# Altium PCB 202112AH743A100.PcbDoc (part 1 of 2)
Units mil, origin at the board's own origin, x right, y up, seen from the top; angles counter-clockwise.
Board outline 1968.5 x 1968.5 mil, 4 copper layers (Top Layer, Int1 (GND), Int2 (PWR), Bottom Layer), stack 52.573 mil thick; 109 components, 209 nets, 816 pads, 136 vias.
Unrouted connection lines stored in the file: 309.
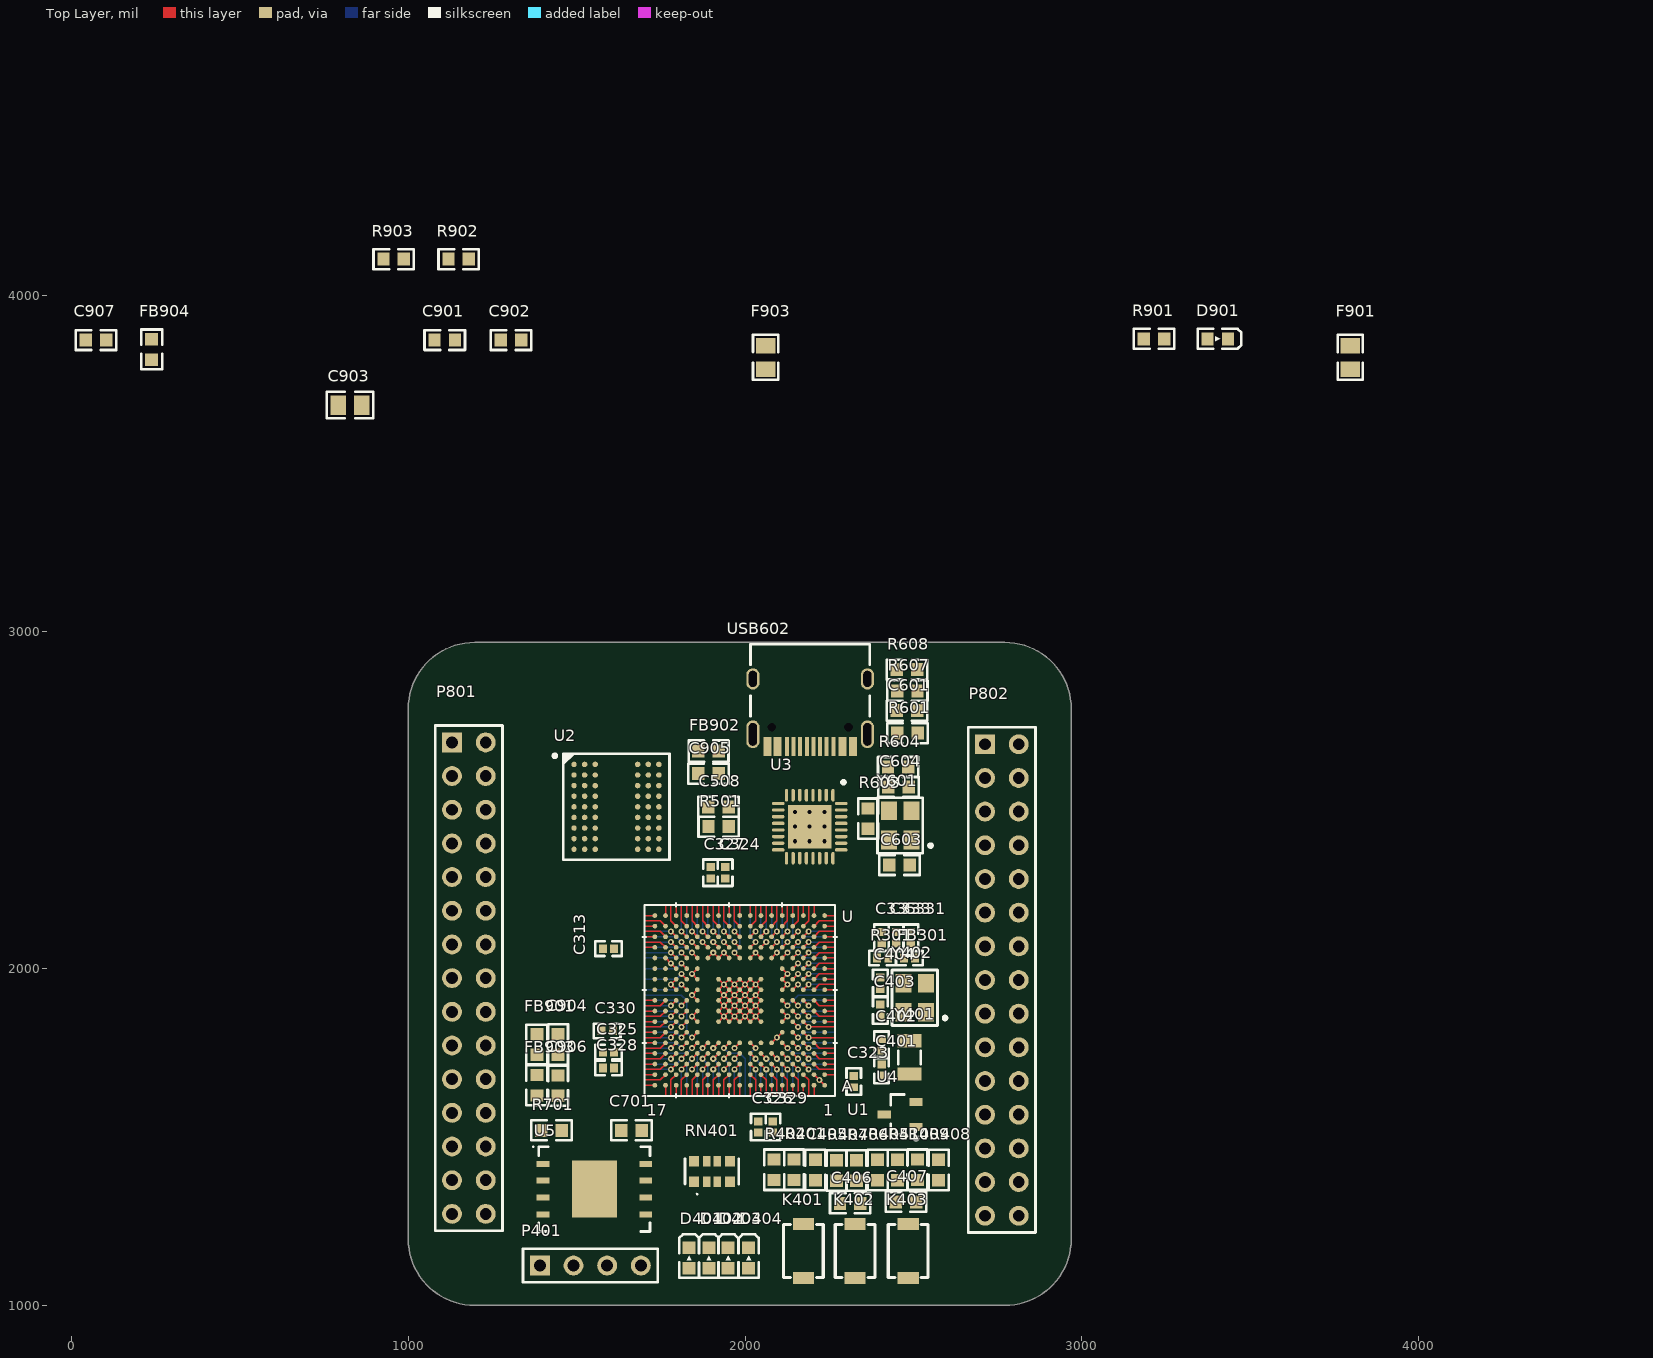
[diagram p0: Top Layer view]
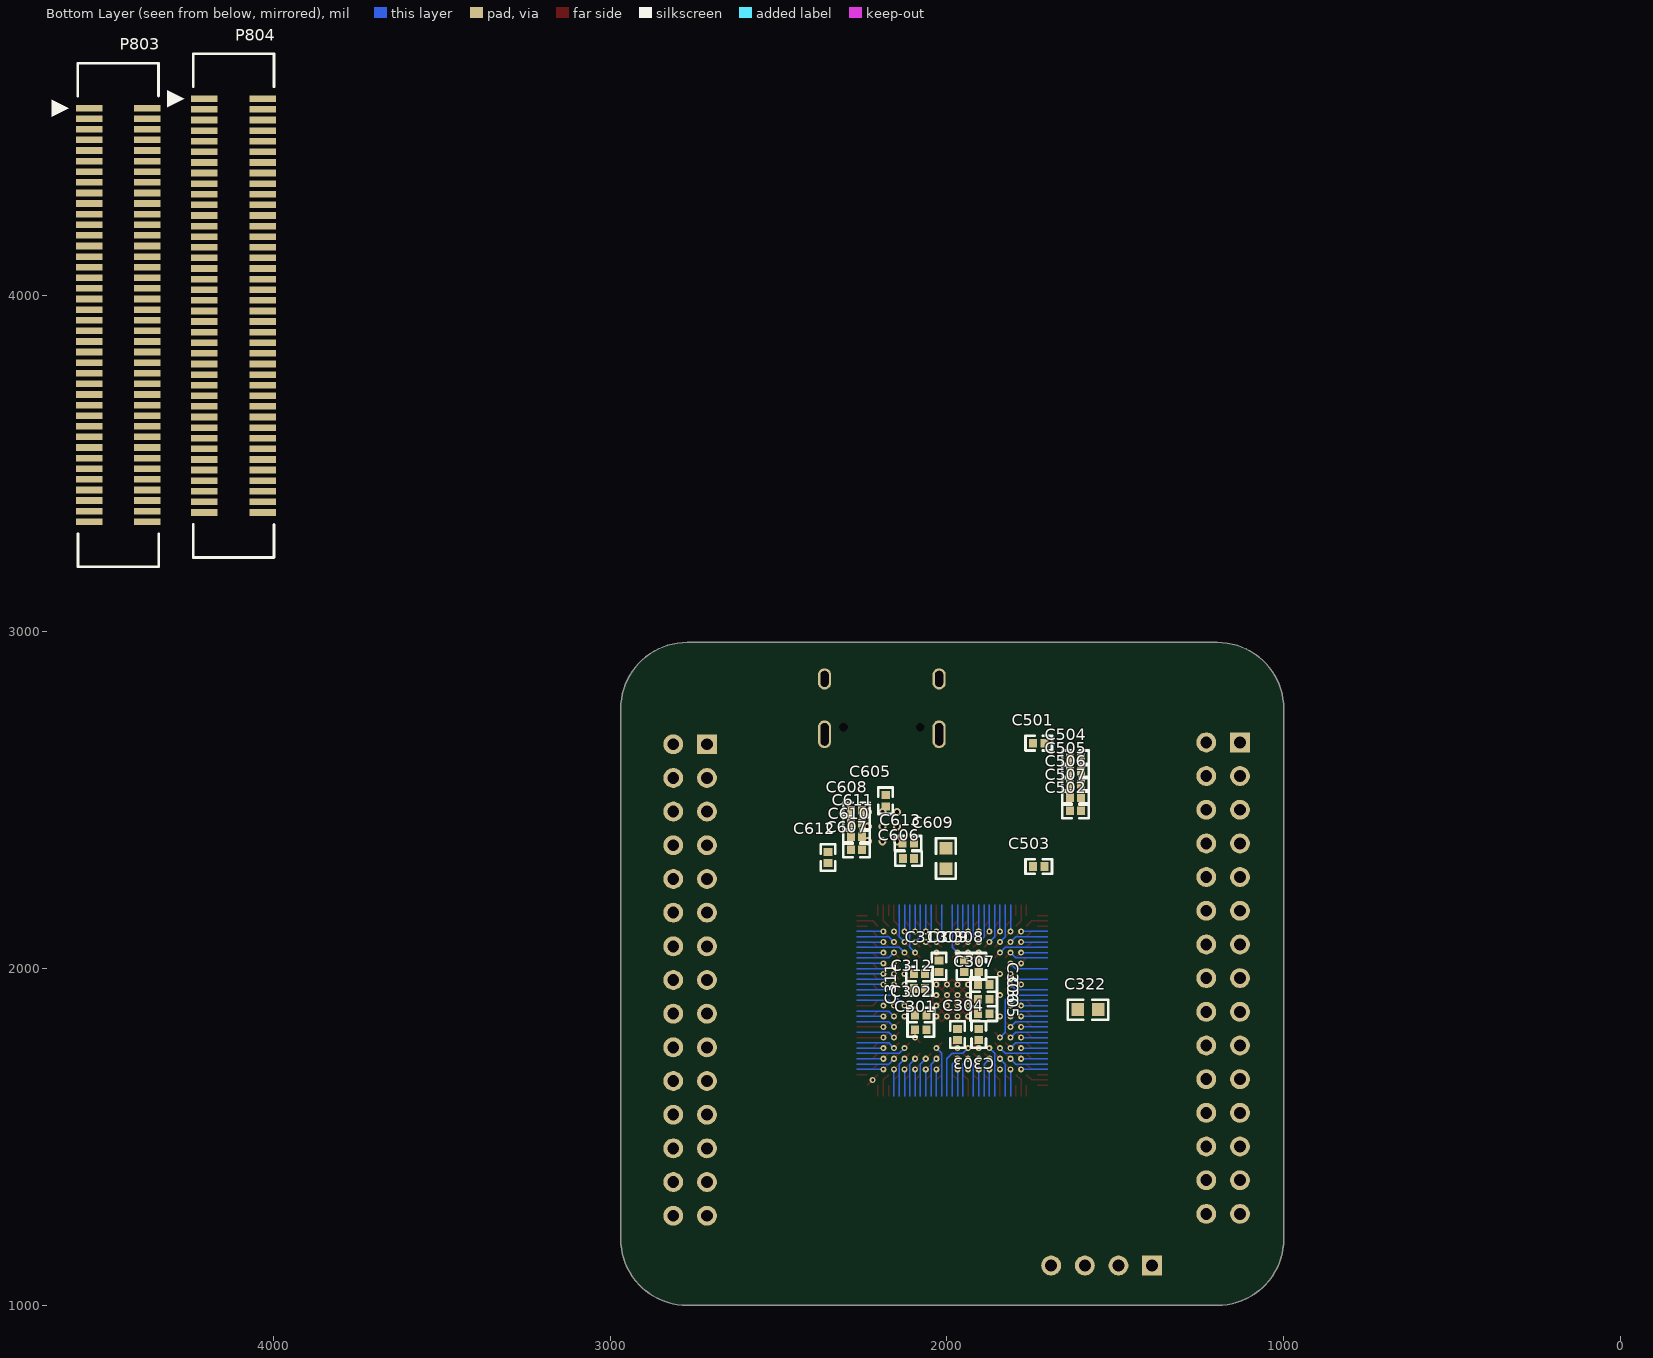
[diagram p1: Bottom Layer view, seen from below]

## Layer stack, top to bottom
Top Solder: solder mask 1, SM-001, Dk 4
Top Layer: signal copper 1.378
Dielectric 1: prepreg 5.1, PP-017, Dk 4.3
Dielectric 2: prepreg 5.1, PP-017, Dk 4.3
Int1 (GND): signal copper 0.7087
Dielectric 3: core 28, Core-039, Dk 4.8
Int2 (PWR): signal copper 0.7087
Dielectric 4: prepreg 5.1, PP-017, Dk 4.3
Dielectric 5: prepreg 5.1, PP-017, Dk 4.3
Bottom Layer: signal copper 1.378
Bottom Solder: solder mask 1, SM-001, Dk 4

## Board outline
1000,1196.85 ccw(c1196.85,1196.85) 1196.85,1000 2771.65,1000 ccw(c2771.65,1196.85) 2968.5,1196.85 2968.5,2771.65 ccw(c2771.65,2771.65) 2771.65,2968.5 1196.85,2968.5 ccw(c1196.85,2771.65) 1000,2771.65

## Design rules (kind name [scope] priority, off if disabled: settings)
Clearance [All] p1: gap=4 ignorepadtopadclearanceinfootprint=FALSE
HoleSize [All] p1: absolutevalues=TRUE maxlimit=1000 minlimit=1 maxpercent=80.000 minpercent=20.000
PlaneConnect [All] p1: planeconnectstyle=Direct reliefexpansion=20 reliefentries=4 reliefconductorwidth=10 reliefairgap=10
PolygonConnect [All] p1: connectstyle=Relief reliefconductorwidth=10 reliefentries=4 polygonreliefangle="90 Angle" airgapwidth=10
RoutingVias [All] p1: holewidth=8 width=18 viastyle="Through Hole" minholewidth=7.87 minwidth=17.72 maxholewidth=28 maxwidth=50
SolderMaskExpansion SolderMaskExpansion_Via [IsVia] p1: expansion=4 istentingtop=TRUE
SolderMaskExpansion [All] p2: expansion=4 istentingtop=FALSE
Width [All] p1: maxlimit=30 minlimit=3.5 preferedwidth=4 midlayer1_maxwidth=10 midlayer2_maxwidth=10 minimp=50.000000 maximp=50.000000 favimp=50.000000
28 further rules are at their usual default settings.

## Classes and differential pairs
net class USB_ULPI_D[7..0]: PA3 PB0 PB1 PB5 PB10 PB11 PB12 PB13
net class QSPI_BK2_IO[3..0]: PG9 PG14 PH2 PH3
net class QSPI_BK1_IO[3..0]: PC10 PE2 PF6 PF8
net class PK[7..0]: PK0 PK1 PK2 PK3 PK4 PK5 PK6 PK7
net class PJ[15..0]: PJ0 PJ1 PJ2 PJ3 PJ4 PJ5 PJ6 PJ7 PJ8 PJ9 PJ10 PJ11 PJ12 PJ13 PJ14 PJ15
net class PI[15..0]: PI0 PI1 PI2 PI3 PI4 PI5 PI6 PI7 PI8 PI9 PI10 PI11 PI12 PI13 PI14 PI15
net class PH[15..0]: PH0 PH1 PH2 PH3 PH4 PH5 PH6 PH7 PH8 PH9 PH10 PH11 PH12 PH13 PH14 PH15
net class PG[15..0]: FMC_A10 FMC_A11 FMC_A12 PG3 PG4 PG5 PG6 PG7 PG8 PG9 PG10 PG11 PG12 PG13 PG14 PG15
net class PF[15..0]: FMC_A0 FMC_A1 FMC_A2 FMC_A3 FMC_A4 FMC_A5 FMC_A6 FMC_A7 FMC_A8 FMC_A9 PF6 PF7 PF8 PF9 PF10 PF11
net class PE[15..0]: FMC_D4 FMC_D5 FMC_D6 FMC_D7 FMC_D8 FMC_D9 FMC_D10 FMC_D11 FMC_D12 PE0 PE1 PE2 PE3 PE4 PE5 PE6
net class PD[15..0]: FMC_D0 FMC_D1 FMC_D2 FMC_D3 FMC_D13 FMC_D14 FMC_D15 PD2 PD3 PD4 PD5 PD6 PD7 PD11 PD12 PD13
net class PC[15..0]: PC0 PC1 PC2 PC3 PC4 PC5 PC6 PC7 PC8 PC9 PC10 PC11 PC12 PC13 PC14 PC15
net class PB[15..0]: PB0 PB1 PB2 PB3 PB4 PB5 PB6 PB7 PB8 PB9 PB10 PB11 PB12 PB13 PB14 PB15
net class PA[15..0]: PA0 PA1 PA2 PA3 PA4 PA5 PA6 PA7 PA8 PA9 PA10 PA11 PA12 PA13 PA14 PA15
net class FMC_D[15..0]: FMC_D0 FMC_D1 FMC_D2 FMC_D3 FMC_D4 FMC_D5 FMC_D6 FMC_D7 FMC_D8 FMC_D9 FMC_D10 FMC_D11 FMC_D12 FMC_D13 FMC_D14 FMC_D15
net class FMC_A[12..0]: FMC_A0 FMC_A1 FMC_A2 FMC_A3 FMC_A4 FMC_A5 FMC_A6 FMC_A7 FMC_A8 FMC_A9 FMC_A10 FMC_A11 FMC_A12
component class Designator: C301 C302 C303 C304 C305 C306 C307 C308 C309 C310 C311 C312 C313 C322 C323 C324 C325 C326 C327 C328 C329 C330 C331 C333 C335 FB301 R301 U4

## Components (designator, comment, footprint, x,y, rotation, side; value= is the part's Value field where it differs from the comment)
C301 "Cap" C0402 2077.76,1818.9 r0 bottom value=0.1uf
C302 "Cap" C0402 2077.76,1862.21 r0 bottom value=0.1uf
C303 "Cap" C0402 1968.5,1804.13 r270 bottom value=0.1uf
C304 "Cap" C0402 1905.51,1804.13 r270 bottom value=0.1uf
C305 "Cap" C0402 1890.75,1866.14 r180 bottom value=0.1uf
C306 "Cap" C0402 1890.75,1909.45 r180 bottom value=0.1uf
C307 "Cap" C0402 1890.75,1952.76 r180 bottom value=0.1uf
C308 "Cap" C0402 1905.51,2006.89 r90 bottom value=0.1uf
C309 "Cap" C0402 1948.82,2006.89 r90 bottom value=0.1uf
C310 "Cap" C0402 2023.62,2006.89 r90 bottom value=0.1uf
C311 "Cap" C0402 2081.69,1984.25 r0 bottom value=0.1uf
C312 "Cap" C0402 2081.69,1940.95 r0 bottom value=0.1uf
C313 "Cap" C0402 1594.49,2059.05 r0 top value=0.1uf
C322 "Cap" C0603 1581.5,1877.95 r180 bottom value=4.7uf
C323 "Cap" C0402 2322.83,1664.37 r90 top value=0.1uf
C324 "Cap" C0402 1940.94,2284.45 r270 top value=2.2uf
C325 "Cap" C0402 1594.49,1751.97 r0 top value=2.2uf
C326 "Cap" C0402 2039.37,1529.53 r90 top value=2.2uf
C327 "Cap" C0402 1897.64,2284.45 r270 top value=4.7uf
C328 "Cap" C0402 1594.49,1704.72 r0 top value=4.7uf
C329 "Cap" C0402 2082.68,1529.53 r90 top value=4.7uf
C330 "Cap" C0402 1590.55,1814.96 r0 top value=1uf
C331 "Cap" C0402 2492.12,2091.54 r270 top value=4.7uf
C333 "Cap" C0402 2448.82,2091.54 r270 top value=1uf
C335 "Cap" C0402 2405.51,2091.54 r270 top value=1uf
C401 "Cap" C0402 2405.51,1698.82 r90 top value=22pf
C402 "Cap" C0402 2405.51,1773.62 r270 top value=22pf
C403 "Cap" C0402 2401.57,1875.98 r90 top value=22pf
C404 "Cap" C0402 2401.57,1956.69 r270 top value=22pf
C405 "Cap" C0603 2208.66,1401.57 r270 top value=0.1uf
C406 "Cap" C0603 2312.21,1303.15 r0 top value=0.1uf
C407 "Cap" C0603 2477.56,1307.09 r0 top value=0.1uf
C501 "Cap" C0402 1727.36,2669.29 r0 bottom value=0.1uf
C502 "Cap" C0402 1618.11,2468.5 r0 bottom value=0.1uf
C503 "Cap" C0402 1727.36,2303.15 r0 bottom value=0.1uf
C504 "Cap" C0402 1618.11,2625.98 r0 bottom value=0.1uf
C505 "Cap" C0402 1618.11,2586.61 r180 bottom value=0.1uf
C506 "Cap" C0402 1618.11,2547.24 r0 bottom value=0.1uf
C507 "Cap" C0402 1618.11,2507.87 r180 bottom value=0.1uf
C508 "Cap" C0603 1921.26,2480.31 r180 top value=4.7uf
C601 "Cap" C0603 2481.1,2765.75 r180 top value=4.7uf
C603 "Cap" C0603 2458.46,2307.28 r0 top value=22pf
C604 "Cap" C0603 2455.71,2539.57 r180 top value=22pf
C605 "Cap" C0402 2182.09,2498.23 r90 bottom value=0.1uf
C606 "Cap" C0402 2114.17,2326.97 r180 bottom value=0.1uf
C607 "Cap" C0402 2268.7,2352.56 r0 bottom value=0.1uf
C608 "Cap" C0402 2268.7,2470.67 r0 bottom value=0.1uf
C609 "Cap" C0603 2002.95,2326.97 r90 bottom value=4.7uf
C610 "Cap" C0402 2268.7,2391.93 r0 bottom value=4.7uf
C611 "Cap" C0402 2268.7,2431.3 r0 bottom value=0.1uf
C612 "Cap" C0402 2353.35,2329.92 r90 bottom value=4.7uf
C613 "Cap" C0402 2115.16,2372.24 r180 bottom value=0.1uf
C701 "Cap" C0603 1662.6,1519.68 r0 top value=0.1uf
C901 "Cap" C0603 1108.27,3866.13 r0 top value=1uf
C902 "Cap" C0603 1305.12,3866.13 r0 top value=10nf
C903 "Cap" C0805 826.77,3673.23 r0 top value=10uf
C904 "Cap" C0603 1444.88,1774.41 r90 top value=0.1uf
C905 "Cap" C0603 1891.54,2578.74 r0 top value=0.1uf
C906 "Cap" C0603 1444.88,1652.36 r270 top value=0.1uf
C907 "Cap" C0603 72.83,3866.13 r0 top value=0.1uf
D401 "LED" LED0603 1833.77,1140.86 r90 top value=RED
D402 "LED" LED0603 1892.83,1140.86 r90 top value=BLUE
D403 "LED" LED0603 1949.91,1140.86 r90 top value=GREEN
D404 "LED" LED0603 2010.94,1140.86 r90 top value=YELLOW
D901 "LED" LED0603 3403.54,3870.07 r0 top value=GREEN
F901 "Fuse" F0805 3797.24,3814.95 r90 top value=6V@1.1A
F903 "Fuse" F0805 2061.02,3814.95 r90 top value=6V@1.1A
FB301 "Ferrite Bead" FB0402 2488.19,2031.5 r180 top value=600R@0.3A
FB901 "Ferrite Bead" FB0603 1381.89,1774.41 r90 top value=600R@400mA
FB902 "Ferrite Bead" FB0603 1891.73,2645.67 r0 top value=600R@400mA
FB903 "Ferrite Bead" FB0603 1381.89,1653.54 r270 top value=600R@400mA
FB904 "Ferrite Bead" FB0603 238.19,3838.57 r90 top value=600R@400mA
K401 "Button" Button-SMD-3.0x4.0x2.0 2173.22,1161.41 r90 top
K402 "Button" Button-SMD-3.0x4.0x2.0 2326.77,1161.42 r90 top
K403 "Button" Button-SMD-3.0x4.0x2.0 2484.25,1161.42 r90 top
P401 "Header 4" HDR1X4 1390.55,1118.11 r0 top
P801 "Header 15X2" HDR2X15 1129.92,2671.65 r270 top
P802 "Header 15X2" HDR2X15 2712.6,2666.14 r270 top
P803 "BTB 80P" BTB-0.8mm-80P-F 4460.63,3940.94 r270 bottom
P804 "BTB 80P" BTB-0.8mm-80P-F 4118.11,3968.5 r270 bottom
R301 "Res" R0402 2408.46,2031.5 r180 top value=10R
R401 "Res" R0603 2145.67,1402.76 r270 top value=NC
R402 "Res" R0603 2086.61,1402.76 r270 top value=10K
R405 "Res" R0603 2393.7,1401.57 r90 top value=4K7
R406 "Res" R0603 2330.71,1400.39 r270 top value=0R
R407 "Res" R0603 2271.65,1400.39 r270 top value=100R
R408 "Res" R0603 2574.8,1401.57 r90 top value=4K7
R409 "Res" R0603 2511.81,1402.76 r270 top value=0R
R410 "Res" R0603 2452.76,1401.57 r270 top value=100R
R501 "Res" R0603 1921.65,2421.26 r180 top value=10K
R601 "Res" R0603 2482.28,2698.82 r0 top value=820R
R603 "Res" R0603 2365.16,2445.08 r90 top value=1M
R604 "Res" R0603 2454.53,2598.62 r180 top value=12K
R607 "Res" R0603 2481.89,2824.8 r180 top value=5K1
R608 "Res" R0603 2480.71,2887.8 r180 top value=5K1
R701 "Res" R0603 1425.2,1519.68 r0 top value=10K
R901 "Res" R0603 3214.56,3870.07 r0 top value=1K
R902 "Res" R0603 1149.61,4106.3 r0 top value=?K
R903 "Res" R0603 956.69,4106.3 r0 top value=?K
RN401 "Res Array" RA0603 1901.57,1397.64 r90 top value=1K
U1 "STM32H743XIH6" STM32H743XIH6-TFBGA240+25 1984.25,1905.51 r180 top locked
U2 "IS42S16160J" IS42S16160J-TFBGA54 1618.11,2480.32 r0 top
U3 "USB3300" USB3300-QFN32 2191.93,2421.46 r270 top
U4 "BAT54C" BAT54X-SOT23 2460.63,1566.93 r180 top
U5 "W25Q256" W25Q256-WSON8-8X6 1552.36,1345.08 r0 top
USB602 "USB" USB-TYPEC-F-16P-THD 2193.31,2659.65 r180 top
Y401 "XTAL" XTAL-3215 2488.19,1736.22 r90 top value=32.768KHz
Y402 "XTAL" XTAL-3225 2503.94,1913.39 r90 top value=25.000M
Y601 "XTAL" XTAL-3225 2460.63,2425.2 r90 top value=24.000M

## Footprints (in the part's own frame and the unit in brackets; to place one, negate y for a bottom-side part, rotate by r counter-clockwise, add the part's x,y. Pads: shape width x height; smd on the part's side, far side on the other; paste and mask are expansions set on the pad)
BAT54X-SOT23 [mm] "SOT23, 3-Leads, Body 2.90x2.37mm, Pitch 0.95mm, IPC Medium Density"
  rect 1x0.6 smd: 1(-1.2,0.95) 2(-1.2,-0.95) 3(1.2,0)
  silkscreen extent -1.33,-1.5 0.7,1.92, body extent -1.32,-1.5 1.32,1.5, height 1.2
BTB-0.8mm-80P-F [mm] "TE-5177983"
  rect 0.5x2 smd: 1(-15.6,-2.2) 2(-15.6,2.2) 3(-14.8,-2.2) 4(-14.8,2.2) 5(-14,-2.2) 6(-14,2.2) 7(-13.2,-2.2) 8(-13.2,2.2) 9(-12.4,-2.2) 10(-12.4,2.2) 11(-11.6,-2.2) 12(-11.6,2.2) 13(-10.8,-2.2) 14(-10.8,2.2) 15(-10,-2.2) 16(-10,2.2) 17(-9.2,-2.2) 18(-9.2,2.2) 19(-8.4,-2.2) 20(-8.4,2.2) 21(-7.6,-2.2) 22(-7.6,2.2) 23(-6.8,-2.2) 24(-6.8,2.2) 25(-6,-2.2) 26(-6,2.2) 27(-5.2,-2.2) 28(-5.2,2.2) 29(-4.4,-2.2) 30(-4.4,2.2) 31(-3.6,-2.2) 32(-3.6,2.2) 33(-2.8,-2.2) 34(-2.8,2.2) 35(-2,-2.2) 36(-2,2.2) 37(-1.2,-2.2) 38(-1.2,2.2) 39(-0.4,-2.2) 40(-0.4,2.2) 41(0.4,-2.2) 42(0.4,2.2) 43(1.2,-2.2) 44(1.2,2.2) 45(2,-2.2) 46(2,2.2) 47(2.8,-2.2) 48(2.8,2.2) 49(3.6,-2.2) 50(3.6,2.2) 51(4.4,-2.2) 52(4.4,2.2) 53(5.2,-2.2) 54(5.2,2.2) 55(6,-2.2) 56(6,2.2) 57(6.8,-2.2) 58(6.8,2.2) 59(7.6,-2.2) 60(7.6,2.2) 61(8.4,-2.2) 62(8.4,2.2) 63(9.2,-2.2) 64(9.2,2.2) 65(10,-2.2) 66(10,2.2) 67(10.8,-2.2) 68(10.8,2.2) 69(11.6,-2.2) 70(11.6,2.2) 71(12.4,-2.2) 72(12.4,2.2) 73(13.2,-2.2) 74(13.2,2.2) 75(14,-2.2) 76(14,2.2) 77(14.8,-2.2) 78(14.8,2.2) 79(15.6,-2.2) 80(15.6,2.2)
  round 0 hole 1.3: ""(-18.1,0)
  round 0 hole 0.9: ""(18.1,0)
  silkscreen extent -18.99,-5 18.99,3.05, body extent -18.9,-3 18.9,3, height 3.75
Button-SMD-3.0x4.0x2.0 [mm] "微动开关(贴片) 3*4*2MM"
  rect 0.9x1.6 smd: 1(-2.05,0) 2(2.05,0)
  silkscreen extent -2,-1.5 2,1.5, body extent -2.45,-1.45 2.45,1.45, height 2
C0402 [mm] "Chip Capacitor, 2-Leads, Body 1.00x0.50mm, IPC Medium Density"
  rect 0.6x0.65 smd mask+0.051: 1(-0.425,0) 2(0.425,0)
  silkscreen extent -1,-0.55 1,0.55, body extent -0.5,-0.25 0.5,0.25, height 0.48
C0603 [mm] "Chip Capacitor, 2-Leads, Body 1.60x0.81mm, IPC Medium Density"
  rect 0.93x0.98 smd: 1(-0.77,0) 2(0.77,0)
  silkscreen extent -1.52,-0.75 1.52,0.75, body extent -0.8,-0.4 0.8,0.4, height 0.78
C0805 [mm] "Chip Capacitor, 2-Leads, Body 2.01x1.25mm, IPC Medium Density"
  rect 1.16x1.47 smd: 1(-0.89,0) 2(0.89,0)
  silkscreen extent -1.75,-1 1.75,1, body extent -1,-0.62 1,0.63, height 0.58
F0805 [mm] "Chip Resistor, 2-Leads, Body 2.00x1.25mm, IPC Medium Density"
  rect 1.16x1.47 smd: 1(-0.89,0) 2(0.89,0)
  silkscreen extent -1.7,-0.95 1.7,0.95, body extent -1,-0.6 1,0.6, height 0.48
FB0402 [mm] "Chip Inductor, 2-Leads, Body 1.00x0.50mm, IPC Medium Density"
  rect 0.6x0.65 smd mask+0.051: 1(-0.425,0) 2(0.425,0)
  silkscreen extent -1,-0.55 1,0.55, body extent -0.53,-0.28 0.53,0.28, height 0.55
FB0603 [mm] "Chip Inductor, 2-Leads, Body 1.60x0.80mm, IPC Medium Density"
  rect 0.93x0.98 smd: 1(-0.77,0) 2(0.77,0)
  silkscreen extent -1.5,-0.8 1.5,0.8, body extent -0.8,-0.4 0.8,0.4, height 0.8
HDR1X4 [mm] "Connector; Header; 4 Position"
  rect 1.5x1.5 hole 0.9: 1(0,0)
  round 1.5 hole 0.9: 2(2.54,0) 3(5.08,0) 4(7.62,0)
  silkscreen extent -1.27,-1.27 8.89,1.27, body extent -1.27,-1.27 8.89,1.27, height 5.94
HDR2X15 [mm] "Connector; Header; 15x2 Position"
  rect 1.5x1.5 hole 0.9: 1(0,0)
  round 1.5 hole 0.9: 2(0,2.54) 3(2.54,0) 4(2.54,2.54) 5(5.08,0) 6(5.08,2.54) 7(7.62,0) 8(7.62,2.54) 9(10.16,0) 10(10.16,2.54) 11(12.7,0) 12(12.7,2.54) 13(15.24,0) 14(15.24,2.54) 15(17.78,0) 16(17.78,2.54) 17(20.32,0) 18(20.32,2.54) 19(22.86,0) 20(22.86,2.54) 21(25.4,0) 22(25.4,2.54) 23(27.94,0) 24(27.94,2.54) 25(30.48,0) 26(30.48,2.54) 27(33.02,0) 28(33.02,2.54) 29(35.56,0) 30(35.56,2.54)
  silkscreen extent -1.27,-1.27 36.83,3.81
IS42S16160J-TFBGA54 [mm] "BGA, 54-Leads, Body 8.00x8.00mmx1.20mm, Pitch 0.80mm"
  round 0.41 smd: A1(-3.2,3.2) A2(-2.4,3.2) A3(-1.6,3.2) A7(1.6,3.2) A8(2.4,3.2) A9(3.2,3.2) B1(-3.2,2.4) B2(-2.4,2.4) B3(-1.6,2.4) B7(1.6,2.4) B8(2.4,2.4) B9(3.2,2.4) C1(-3.2,1.6) C2(-2.4,1.6) C3(-1.6,1.6) C7(1.6,1.6) C8(2.4,1.6) C9(3.2,1.6) D1(-3.2,0.8) D2(-2.4,0.8) D3(-1.6,0.8) D7(1.6,0.8) D8(2.4,0.8) D9(3.2,0.8) E1(-3.2,0) E2(-2.4,0) E3(-1.6,0) E7(1.6,0) E8(2.4,0) E9(3.2,0) F1(-3.2,-0.8) F2(-2.4,-0.8) F3(-1.6,-0.8) F7(1.6,-0.8) F8(2.4,-0.8) F9(3.2,-0.8) G1(-3.2,-1.6) G2(-2.4,-1.6) G3(-1.6,-1.6) G7(1.6,-1.6) G8(2.4,-1.6) G9(3.2,-1.6) H1(-3.2,-2.4) H2(-2.4,-2.4) H3(-1.6,-2.4) H7(1.6,-2.4) H8(2.4,-2.4) H9(3.2,-2.4) J1(-3.2,-3.2) J2(-2.4,-3.2) J3(-1.6,-3.2) J7(1.6,-3.2) J8(2.4,-3.2) J9(3.2,-3.2)
  silkscreen extent -4.77,-4 4,4, body extent -4,-4 4,4, height 1.2
LED0603 [mm] "Chip LED, 2-Leads, Body 1.60x0.80mm, IPC Medium Density"
  rect 0.93x0.98 smd: 1(-0.77,0) 2(0.77,0)
  silkscreen extent -1.5,-0.75 1.78,0.75, body extent -0.8,-0.4 0.8,0.4, height 0.6
R0402 [mm] "Chip Resistor, 2-Leads, Body 1.00x0.50mm, IPC Medium Density"
  rect 0.6x0.65 smd mask+0.051: 1(-0.425,0) 2(0.425,0)
  silkscreen extent -1,-0.55 1,0.55, body extent -0.5,-0.25 0.5,0.25, height 0.34
R0603 [mm] "Chip Resistor, 2-Leads, Body 1.60x0.80mm, IPC Medium Density"
  rect 0.93x0.98 smd: 1(-0.77,0) 2(0.77,0)
  silkscreen extent -1.52,-0.75 1.52,0.75, body extent -0.8,-0.4 0.8,0.4, height 0.44
RA0603 [mm] "Res Array, Chip Array, ConvexS, 8-Leads, Pitch 0.80mm,  Body 3.20x1.60mm,  IPC Low Density"
  rect 0.8x0.75 smd mask+0.051: 1(-0.77,1.35) 4(-0.77,-1.35) 5(0.77,-1.35) 8(0.77,1.35)
  rect 0.8x0.58 smd mask+0.051: 2(-0.77,0.4) 3(-0.77,-0.4) 6(0.77,-0.4) 7(0.77,0.4)
  silkscreen extent -1.76,-2.03 0.95,2.03, body extent -0.8,-1.6 0.8,1.6, height 0.5
STM32H743XIH6-TFBGA240+25 [mil]
  round 14 smd paste+0 mask+0: A1(-251.97,251.97) A2(-220.47,251.97) A3(-188.98,251.97) A4(-157.48,251.97) A5(-125.98,251.97) A6(-94.49,251.97) A7(-62.99,251.97) A8(-31.5,251.97) A9(0,251.97) A10(31.5,251.97) A11(62.99,251.97) A12(94.49,251.97) A13(125.98,251.97) A14(157.48,251.97) A15(188.98,251.97) A16(220.47,251.97) A17(251.97,251.97) B1(-251.97,220.47) B2(-220.47,220.47) B3(-188.98,220.47) B4(-157.48,220.47) B5(-125.98,220.47) B6(-94.49,220.47) B7(-62.99,220.47) B8(-31.5,220.47) B9(0,220.47) B10(31.5,220.47) B11(62.99,220.47) B12(94.49,220.47) B13(125.98,220.47) B14(157.48,220.47) B15(188.98,220.47) B16(220.47,220.47) B17(251.97,220.47) C1(-251.97,188.98) C2(-220.47,188.98) C3(-188.98,188.98) C4(-157.48,188.98) C5(-125.98,188.98) C6(-94.49,188.98) C7(-62.99,188.98) C8(-31.5,188.98) C9(0,188.98) C10(31.5,188.98) C11(62.99,188.98) C12(94.49,188.98) C13(125.98,188.98) C14(157.48,188.98) C15(188.98,188.98) C16(220.47,188.98) C17(251.97,188.98) D1(-251.97,157.48) D2(-220.47,157.48) D3(-188.98,157.48) D4(-157.48,157.48) D5(-125.98,157.48) D6(-94.49,157.48) D7(-62.99,157.48) D8(-31.5,157.48) D9(0,157.48) D10(31.5,157.48) D11(62.99,157.48) D12(94.49,157.48) D13(125.98,157.48) D14(157.48,157.48) D15(188.98,157.48) D16(220.47,157.48) D17(251.97,157.48) E1(-251.97,125.98) E2(-220.47,125.98) E3(-188.98,125.98) E4(-157.48,125.98) E5(-125.98,125.98) E6(-94.49,125.98) E7(-62.99,125.98) E8(-31.5,125.98) E9(0,125.98) E10(31.5,125.98) E11(62.99,125.98) E12(94.49,125.98) E13(125.98,125.98) E14(157.48,125.98) E15(188.98,125.98) E16(220.47,125.98) E17(251.97,125.98) F1(-251.97,94.49) F2(-220.47,94.49) F3(-188.98,94.49) F4(-157.48,94.49) F5(-125.98,94.49) F13(125.98,94.49) F14(157.48,94.49) F15(188.98,94.49) F16(220.47,94.49) F17(251.97,94.49) G1(-251.97,62.99) G2(-220.47,62.99) G3(-188.98,62.99) G4(-157.48,62.99) G5(-125.98,62.99) G7(-62.99,62.99) G8(-31.5,62.99) G9(0,62.99) G10(31.5,62.99) G11(62.99,62.99) G13(125.98,62.99) G14(157.48,62.99) G15(188.98,62.99) G16(220.47,62.99) G17(251.97,62.99) H1(-251.97,31.5) H2(-220.47,31.5) H3(-188.98,31.5) H4(-157.48,31.5) H5(-125.98,31.5) H7(-62.99,31.5) H8(-31.5,31.5) H9(0,31.5) H10(31.5,31.5) H11(62.99,31.5) H13(125.98,31.5) H14(157.48,31.5) H15(188.98,31.5) H16(220.47,31.5) H17(251.97,31.5) J1(-251.97,0) J2(-220.47,0) J3(-188.98,0) J4(-157.48,0) J5(-125.98,0) J7(-62.99,0) J8(-31.5,0) J9(0,0) J10(31.5,0) J11(62.99,0) J13(125.98,0) J14(157.48,0) J15(188.98,0) J16(220.47,0) J17(251.97,0) K1(-251.97,-31.5) K2(-220.47,-31.5) K3(-188.98,-31.5) K4(-157.48,-31.5) K5(-125.98,-31.5) K7(-62.99,-31.5) K8(-31.5,-31.5) K9(0,-31.5) K10(31.5,-31.5) K11(62.99,-31.5) K13(125.98,-31.5) K14(157.48,-31.5) K15(188.98,-31.5) K16(220.47,-31.5) K17(251.97,-31.5) L1(-251.97,-62.99) L2(-220.47,-62.99) L3(-188.98,-62.99) L4(-157.48,-62.99) L5(-125.98,-62.99) L7(-62.99,-62.99) L8(-31.5,-62.99) L9(0,-62.99) L10(31.5,-62.99) L11(62.99,-62.99) L13(125.98,-62.99) L14(157.48,-62.99) L15(188.98,-62.99) L16(220.47,-62.99) L17(251.97,-62.99) M1(-251.97,-94.49) M2(-220.47,-94.49) M3(-188.98,-94.49) M4(-157.48,-94.49) M5(-125.98,-94.49) M13(125.98,-94.49) M14(157.48,-94.49) M15(188.98,-94.49) M16(220.47,-94.49) M17(251.97,-94.49) N1(-251.97,-125.98) N2(-220.47,-125.98) N3(-188.98,-125.98) N4(-157.48,-125.98) N5(-125.98,-125.98) N6(-94.49,-125.98) N7(-62.99,-125.98) N8(-31.5,-125.98) N9(0,-125.98) N10(31.5,-125.98) N11(62.99,-125.98) N12(94.49,-125.98) N13(125.98,-125.98) N14(157.48,-125.98) N15(188.98,-125.98) N16(220.47,-125.98) N17(251.97,-125.98) P1(-251.97,-157.48) P2(-220.47,-157.48) P3(-188.98,-157.48) P4(-157.48,-157.48) P5(-125.98,-157.48) P6(-94.49,-157.48) P7(-62.99,-157.48) P8(-31.5,-157.48) P9(0,-157.48) P10(31.5,-157.48) P11(62.99,-157.48) P12(94.49,-157.48) P13(125.98,-157.48) P14(157.48,-157.48) P15(188.98,-157.48) P16(220.47,-157.48) P17(251.97,-157.48) R1(-251.97,-188.98) R2(-220.47,-188.98) R3(-188.98,-188.98) R4(-157.48,-188.98) R5(-125.98,-188.98) R6(-94.49,-188.98) R7(-62.99,-188.98) R8(-31.5,-188.98) R9(0,-188.98) R10(31.5,-188.98) R11(62.99,-188.98) R12(94.49,-188.98) R13(125.98,-188.98) R14(157.48,-188.98) R15(188.98,-188.98) R16(220.47,-188.98) R17(251.97,-188.98) T1(-251.97,-220.47) T2(-220.47,-220.47) T3(-188.98,-220.47) T4(-157.48,-220.47) T5(-125.98,-220.47) T6(-94.49,-220.47) T7(-62.99,-220.47) T8(-31.5,-220.47) T9(0,-220.47) T10(31.5,-220.47) T11(62.99,-220.47) T12(94.49,-220.47) T13(125.98,-220.47) T14(157.48,-220.47) T15(188.98,-220.47) T16(220.47,-220.47) T17(251.97,-220.47) U1(-251.97,-251.97) U2(-220.47,-251.97) U3(-188.98,-251.97) U4(-157.48,-251.97) U5(-125.98,-251.97) U6(-94.49,-251.97) U7(-62.99,-251.97) U8(-31.5,-251.97) U9(0,-251.97) U10(31.5,-251.97) U11(62.99,-251.97) U12(94.49,-251.97) U13(125.98,-251.97) U14(157.48,-251.97) U15(188.98,-251.97) U16(220.47,-251.97) U17(251.97,-251.97)
  silkscreen extent -289,-288 288,288, body extent -278,-278 279,279, height 43
USB3300-QFN32 [mm] "QFN, 32-Leads, Body 5.00x5.00mm, Pitch 0.50mm, Thermal Pad 3.30x3.30mm, IPC Medium Density"
  oval 0.95x0.25 smd: 1(-2.375,1.75) 2(-2.375,1.25) 3(-2.375,0.75) 4(-2.375,0.25) 5(-2.375,-0.25) 6(-2.375,-0.75) 7(-2.375,-1.25) 8(-2.375,-1.75) 17(2.375,-1.75) 18(2.375,-1.25) 19(2.375,-0.75) 20(2.375,-0.25) 21(2.375,0.25) 22(2.375,0.75) 23(2.375,1.25) 24(2.375,1.75)
  oval 0.25x0.95 smd: 9(-1.75,-2.375) 10(-1.25,-2.375) 11(-0.75,-2.375) 12(-0.25,-2.375) 13(0.25,-2.375) 14(0.75,-2.375) 15(1.25,-2.375) 16(1.75,-2.375) 25(1.75,2.375) 26(1.25,2.375) 27(0.75,2.375) 28(0.25,2.375) 29(-0.25,2.375) 30(-0.75,2.375) 31(-1.25,2.375) 32(-1.75,2.375)
  rect 3.3x3.3 smd: 33(0,0)
  silkscreen extent -3.47,2.43 -3.23,2.68, body extent -2.55,-2.55 2.55,2.55, height 1
USB-TYPEC-F-16P-THD [mm] "USB3.1 Type-C Receptacle 16P 4THD"
  oval 1x2.1 hole 0.6 slot 1.7 at 90 deg: 0(-4.32,-0.915) 0(4.32,-0.915)
  oval 1x1.6 hole 0.6 slot 1.2 at 90 deg: 0(-4.32,-5.095) 0(4.32,-5.095)
  round 0 hole 0.65: 0(-2.89,-1.445) 0(2.89,-1.445)
  rect 0.6x1.45 smd: A1/B12(-3.225,0) A4/B9(-2.45,0) B1/A12(3.225,0) B4/A9(2.45,0)
  rect 0.3x1.45 smd: A5(-1.25,0) A6(-0.25,0) A7(0.25,0) A8(1.25,0) B5(1.75,0) B6(0.75,0) B7(-0.75,0) B8(-1.75,0)
  silkscreen extent -4.5,-7.7 4.5,-2.29, body extent -4.47,-7.7 4.47,0.2, height 3.2
W25Q256-WSON8-8X6 [mm] "SON, 8-Leads, Body 6.00x8.00mm, Pitch 1.27mm, Thermal Pad 4.30x3.40mm, IPC Medium Density"
  rect 0.95x0.45 smd: 1(-3.87,1.905) 2(-3.87,0.635) 3(-3.87,-0.635) 4(-3.87,-1.905) 5(3.87,-1.905) 6(3.87,-0.635) 7(3.87,0.635) 8(3.87,1.905)
  rect 3.4x4.3 smd paste-1.7: 9(0,0)
  silkscreen extent -4.65,-3.2 4.2,3.25, body extent -4.05,-3.05 4.05,3.05, height 0.8
XTAL-3215 [mm] "3215贴片晶振"
  rect 1x1.8 smd: 1(-1.25,0) 2(1.25,0)
  silkscreen extent -0.5,-0.85 0.5,0.85, body extent -1.6,-0.75 1.6,0.75, height 0.8
XTAL-3225 [mm] "4脚3225贴片晶振"
  rect 1.4x1.2 smd: 1(-1.1,-0.85) 2(1.1,-0.85) 3(1.1,0.85) 4(-1.1,0.85)
  silkscreen extent -2.1,-2.41 2.1,1.71, body extent -1.6,-1.23 1.6,1.27, height 0.61

## Part data
K401 K402 K403: "微动开关"
P401: "Header, 4-Pin", LatestRevisionDate=17-Jul-2002, LatestRevisionNote="Re-released for DXP Platform.", Publisher="Altium Limited"
P801 P802: "Header, 15-Pin, Dual row", LatestRevisionDate=17-Jul-2002, LatestRevisionNote="Re-released for DXP Platform.", Publisher="Altium Limited"
P803 P804: library part "CON BTB 80P", "Free Height, PCB Mount Receptacle, Vertical, Board-to-Board, 80 Position, .8mm [.031in] Centerline, Gold, Printed Circuit Board", LatestRevisionDate=17-Jul-2002, LatestRevisionNote="Re-released for DXP Platform.", Publisher="Altium Limited"
R301 R401 R402 R405 R406 R407 R408 R409 R410 R501 R601 R603 R604 R607 R608 R701 R901 R902 R903: "电阻"
RN401: library part "Res Array 2", "贴片排阻"
U1: "32-bit Arm® Cortex®-M7 480MHz MCUs, up to 2MB Flash,up to 1MB RAM, 46 com. and analog interfaces"
U2: "32Meg x 8, 16Meg x16, 256Mb SYNCHRONOUS DRAM"
U3: "Hi-Speed USB Host, Device or OTG PHY with ULPI Low Pin Interface"
U4: "Schottky barrier diodes"
U5: "256M-BIT SERIAL FLASH MEMORY WITH DUAL, QUAD SPI"
USB602: library part USB3
Y401: "Crystal Oscillator"
Y402 Y601: library part XTAL3, "Crystal Oscillator"

## Via types
v1: diameter 18, hole 8, Top Layer to Bottom Layer, tented both sides, 127 vias
v2: diameter 24, hole 12, Top Layer to Bottom Layer, tented both sides, 9 vias

## Nets (pads, with @x,y where several pads share a name; then routed paths per layer and width w, separated by ;. In a path a pad name is that pad's centre, name@x,y a point inside that pad or via, vN(x,y) a via of type N, cw(c..) or ccw(c..) an arc to the next point about the centre after c; other vN are vias at no path point)
D3V3_EXT: C907.2 FB904.2
FLASH_D3V3: C605.2 C606.2 C607.2 C608.2 C609.2 C701.2 C906.2 FB903.2 R701.2 U3.6 U3.16 U3.25 U3.30 U3.31 U5.8
FMC_A0: U1.G4 U2.H7 | length 139.5
  Top Layer w4: U1.G4@2141.73,1842.52 v1(2157.48,1826.77)
  Bottom Layer w4: v1(2157.48,1826.77) 2173.23,1842.52 2268.22,1842.52
FMC_A1: U1.G3 U2.H8 | length 101.5
  Top Layer w4: U1.G3@2173.23,1842.52 v1(2188.98,1826.77) 2268.22,1826.77
FMC_A2: U1.G1 U2.J8 | length 32
  Top Layer w4: U1.G1@2236.22,1842.52 2268.22,1842.52
FMC_A3: U1.H4 U2.J7 | length 139.5
  Top Layer w4: U1.H4@2141.73,1874.02 v1(2157.48,1858.27)
  Bottom Layer w4: v1(2157.48,1858.27) 2173.23,1874.02 2268.22,1874.02
FMC_A4: U1.J5 U2.J3 | length 177.6
  Top Layer w4: U1.J5@2110.24,1905.51 v1(2125.98,1889.76)
  Bottom Layer w4: v1(2125.98,1889.76) 2157.48,1921.26 2268.22,1921.26
FMC_A5: U1.J4 U2.J2 | length 139.5
  Top Layer w4: U1.J4@2141.73,1905.51 v1(2157.48,1889.76)
  Bottom Layer w4: v1(2157.48,1889.76) 2173.23,1905.51 2268.22,1905.51
FMC_A6: U1.R7 U2.H3 | length 101.5
  Top Layer w4: U1.R7@2047.24,2094.49 v1(2062.99,2110.24)
  Bottom Layer w4: v1(2062.99,2110.24) 2062.99,2189.48
FMC_A7: U1.P7 U2.H2 | length 139.5
  Top Layer w4: U1.P7@2047.24,2062.99 v1(2062.99,2078.74)
  Bottom Layer w4: 2047.24,2189.48 2047.24,2094.49 v1(2062.99,2078.74)
FMC_A8: U1.P8 U2.H1 | length 139.5
  Top Layer w4: U1.P8@2015.75,2062.99 v1(2031.5,2078.74)
  Bottom Layer w4: 2015.75,2189.48 2015.75,2094.49 v1(2031.5,2078.74)
FMC_A9: U1.R9 U2.G3 | length 101.5
  Top Layer w4: v1(1968.5,2110.24) U1.R9@1984.25,2094.49
  Bottom Layer w4: v1(1968.5,2110.24) 1968.5,2189.48
FMC_A10: U1.T8 U2.H9 | length 70
  Top Layer w4: U1.T8@2015.75,2125.98 2031.5,2141.73 2031.5,2189.48
FMC_A11: U1.U8 U2.G2 | length 32
  Top Layer w4: U1.U8@2015.75,2157.48 2015.75,2189.48
FMC_A12: U1.H16 U2.G1 | length 70
  Top Layer w4: 1700.28,1858.27 1748.03,1858.27 U1.H16@1763.78,1874.02
FMC_D0: U1.P16 U2.A8 | length 70
  Top Layer w4: 1700.28,2078.74 1748.03,2078.74 U1.P16@1763.78,2062.99
FMC_D1: U1.P15 U2.B9 | length 101.5
  Top Layer w4: v1(1779.53,2078.74) U1.P15@1795.28,2062.99
  Bottom Layer w4: 1700.28,2078.74 v1(1779.53,2078.74)
FMC_D2: U1.D13 U2.B8 | length 139.5
  Top Layer w4: v1(1842.52,1732.28) U1.D13@1858.27,1748.03
  Bottom Layer w4: 1826.77,1621.54 1826.77,1716.54 v1(1842.52,1732.28)
FMC_D3: U1.E12 U2.C9 | length 171
  Top Layer w4: v1(1874.02,1763.78) U1.E12@1889.76,1779.53
  Bottom Layer w4: 1858.27,1621.54 1858.27,1748.03 v1(1874.02,1763.78)
FMC_D4: U1.U9 U2.C8 | length 32
  Top Layer w4: U1.U9@1984.25,2157.48 1984.25,2189.48
FMC_D5: U1.T9 U2.D9 | length 70
  Top Layer w4: 1968.5,2189.48 1968.5,2141.73 U1.T9@1984.25,2125.98
FMC_D6: U1.P9 U2.D8 | length 139.5
  Top Layer w4: v1(1968.5,2078.74) U1.P9@1984.25,2062.99
  Bottom Layer w4: 1952.76,2189.48 1952.76,2094.49 v1(1968.5,2078.74)
FMC_D7: U1.N9 U2.E9 | length 171
  Top Layer w4: v1(1968.5,2047.24) U1.N9@1984.25,2031.5
  Bottom Layer w4: v1(1968.5,2047.24) 1984.25,2062.99 1984.25,2189.48
FMC_D8: U1.P10 U2.E1 | length 139.5
  Top Layer w4: v1(1937.01,2078.74) U1.P10@1952.76,2062.99
  Bottom Layer w4: 1921.26,2189.48 1921.26,2094.49 v1(1937.01,2078.74)
FMC_D9: U1.R10 U2.D2 | length 101.5
  Top Layer w4: v1(1937.01,2110.24) U1.R10@1952.76,2094.49
  Bottom Layer w4: v1(1937.01,2110.24) 1937.01,2189.48
FMC_D10: U1.T10 U2.D1 | length 70
  Top Layer w4: 1937.01,2189.48 1937.01,2141.73 U1.T10@1952.76,2125.98
FMC_D11: U1.U10 U2.C2 | length 32
  Top Layer w4: U1.U10@1952.76,2157.48 1952.76,2189.48
FMC_D12: U1.R11 U2.C1 | length 101.5
  Top Layer w4: v1(1905.51,2110.24) U1.R11@1921.26,2094.49
  Bottom Layer w4: v1(1905.51,2110.24) 1905.51,2189.48
FMC_D13: U1.U16 U2.B2 | length 32
  Top Layer w4: U1.U16@1763.78,2157.48 1763.78,2189.48
FMC_D14: U1.T17 U2.B1 | length 32
  Top Layer w4: 1700.28,2125.98 U1.T17@1732.28,2125.98
FMC_D15: U1.T16 U2.A2 | length 70
  Top Layer w4: 1700.28,2141.73 1748.03,2141.73 U1.T16@1763.78,2125.98